# Altium PCB 发射.PcbDoc
Units mil, origin at the board's own origin, x right, y up, seen from the top; angles counter-clockwise.
Board outline 6000 x 4000 mil, 2 copper layers (Top Layer, Bottom Layer); 22 components, 15 nets, 70 pads, 2 vias.
Unrouted connection lines stored in the file: 1.
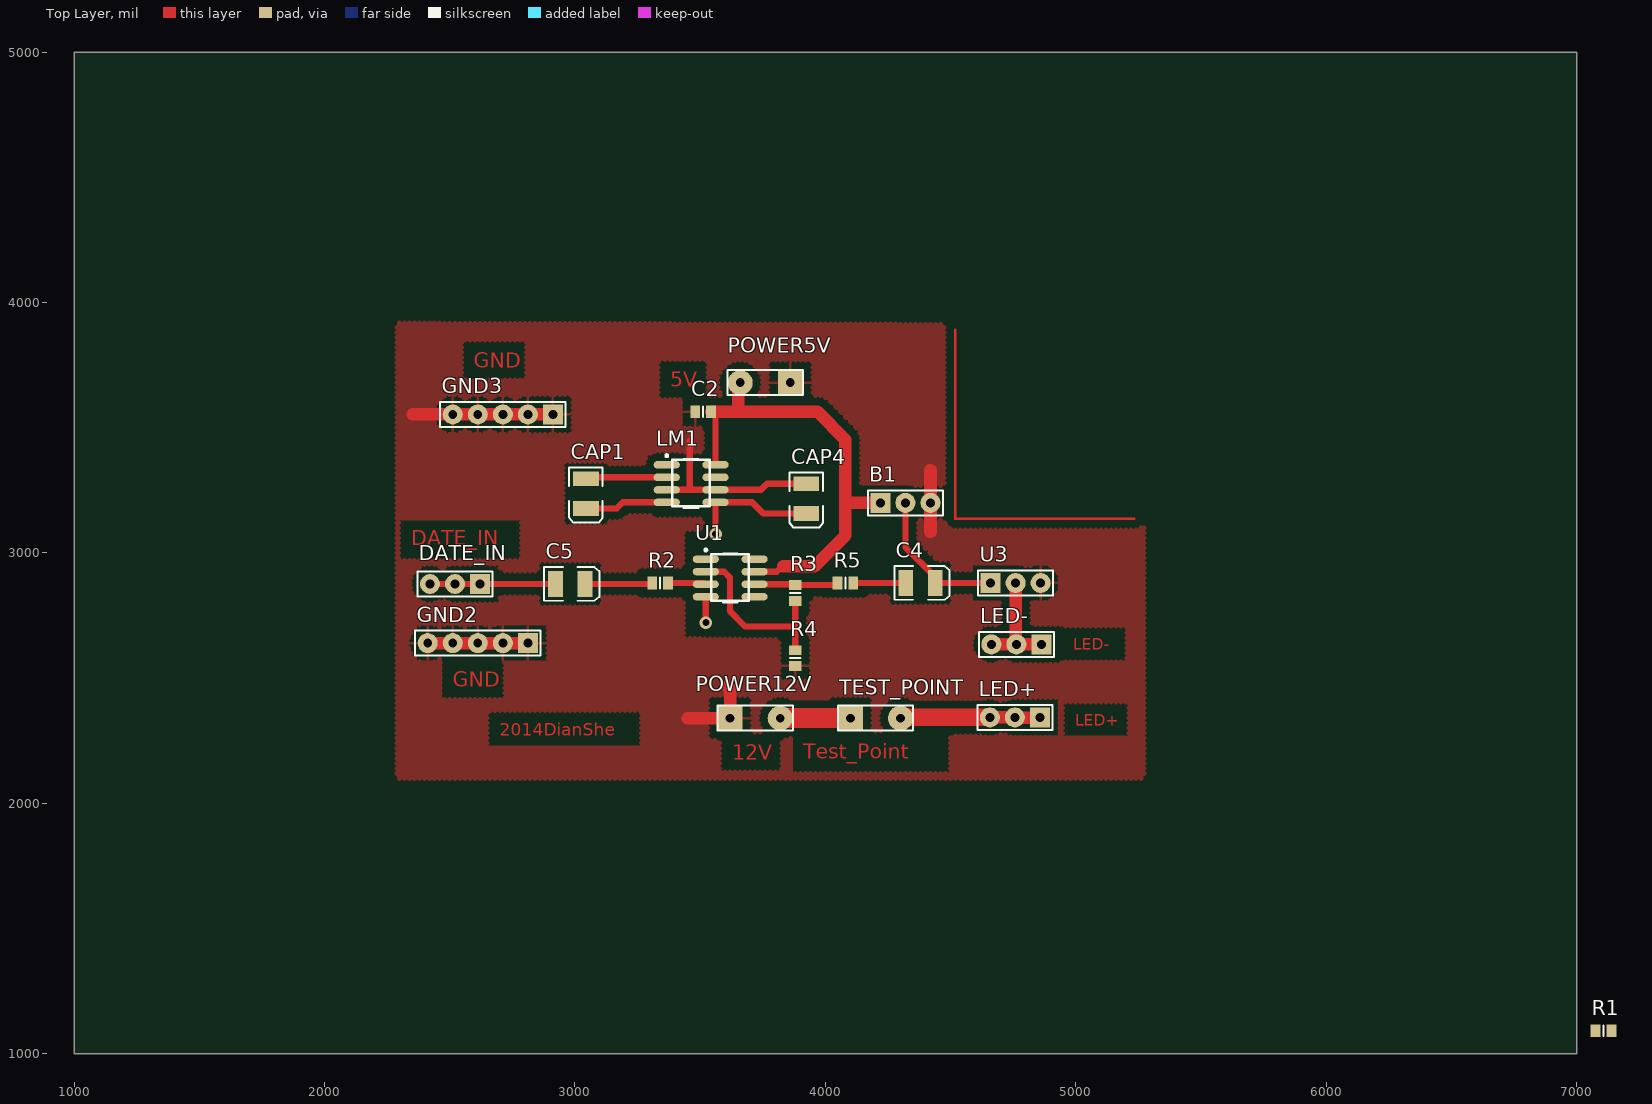
[diagram p0: Top Layer view]
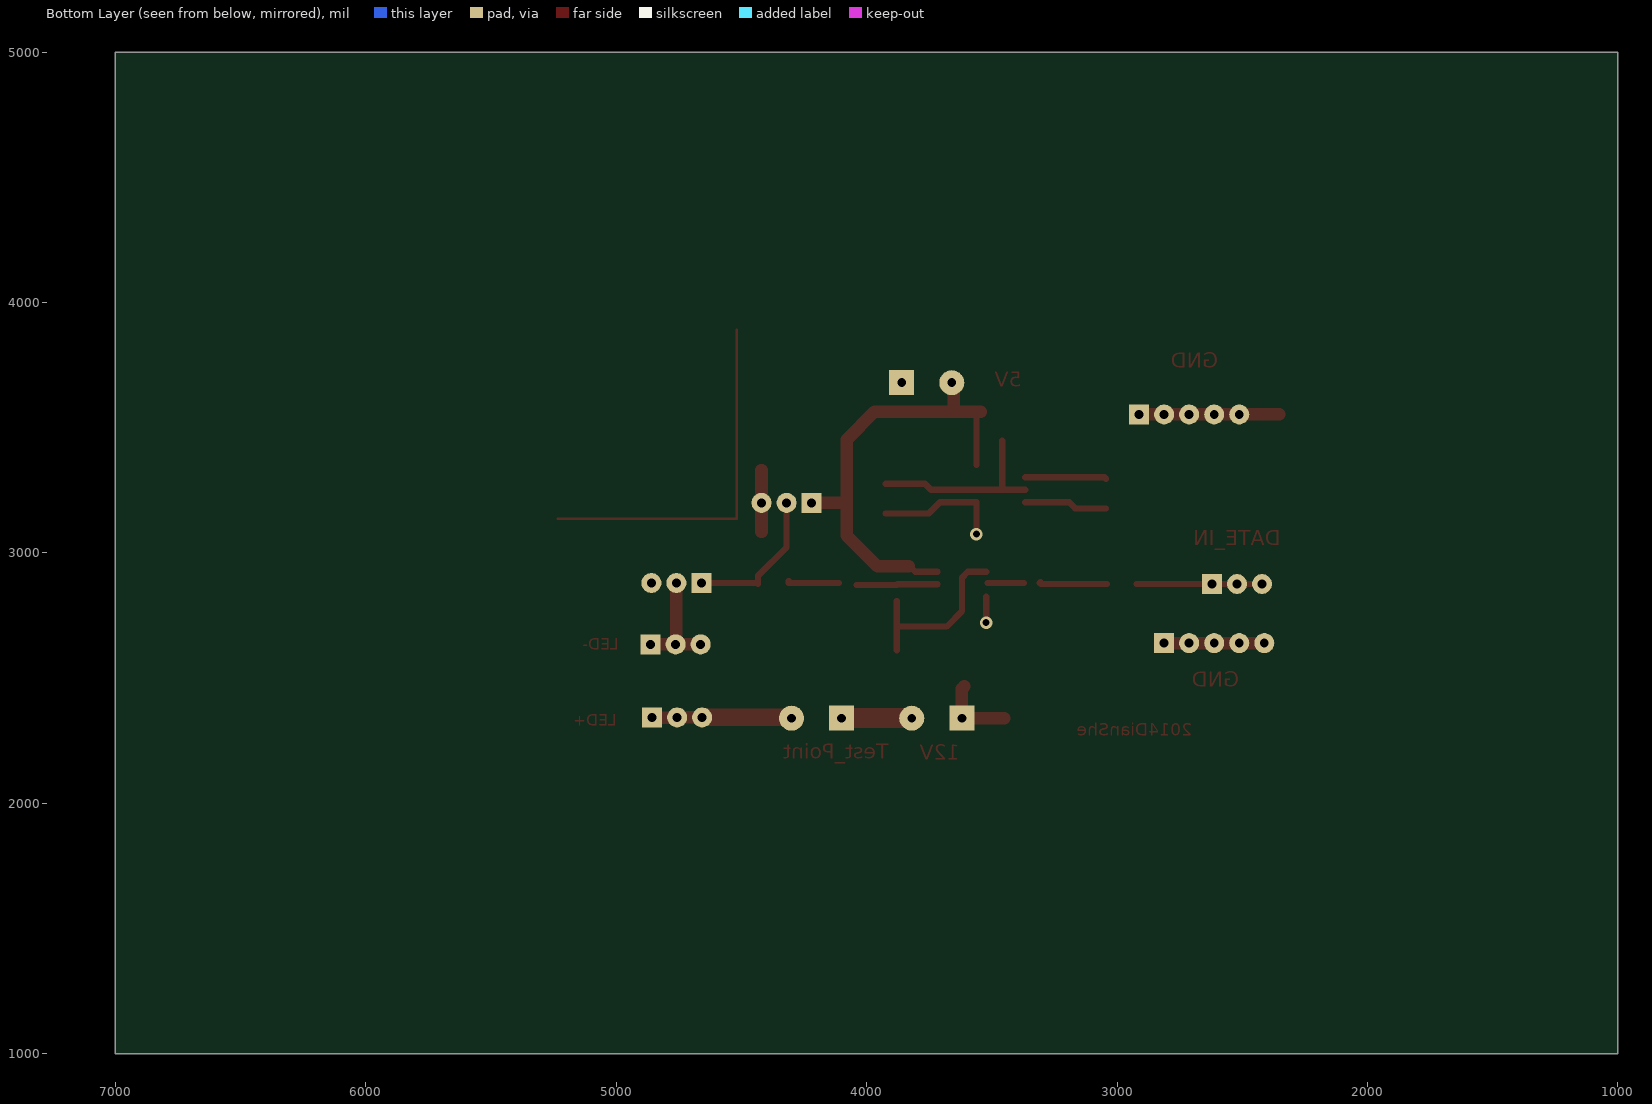
[diagram p1: Bottom Layer view, seen from below]

## Layer stack, top to bottom
Top Layer: signal copper 1.4
Dielectric: dielectric 12.6, FR-4, Dk 4.8
Bottom Layer: signal copper 1.4

## Board outline
1000,1000 7000,1000 7000,5000 1000,5000

## Design rules (kind name [scope] priority, off if disabled: settings)
Clearance [All] p1: gap=30
MinimumSolderMaskSliver [All] p1: minsoldermaskwidth=0
PolygonConnect [All] p1: connectstyle=Relief reliefconductorwidth=10 reliefentries=4 polygonreliefangle="90 Angle"
RoutingVias [All] p1: holewidth=28 width=50 viastyle="Through Hole" minholewidth=28 minwidth=50 maxholewidth=28 maxwidth=50
SilkscreenOverComponentPads [All] p1: minsilkscreentomaskgap=0
SolderMaskExpansion [All] p1: expansion=0
Width [All] p1: maxlimit=100 minlimit=10 preferedwidth=10
26 further rules are at their usual default settings.

## Components (designator, comment, footprint, x,y, rotation, side; value= is the part's Value field where it differs from the comment)
B1 "Header 3" HDR1X3#1 4220,3200 r0 top
C2 "CAP" 0805 3512,3564 r180 top
C4 "无极性" "3528 (3.5X2.8X1.9)" 4380,2880 r0 top
C5 "无极性" "3528 (3.5X2.8X1.9)" 2981,2876 r0 top
CAP1 "Cap B(3528)" "3528 (3.5X2.8X1.9)" 3044,3237 r270 top
CAP4 "Cap B(3528)" "3528 (3.5X2.8X1.9)" 3924,3217 r270 top
DATE_IN "Header 3" HDR1X3#1 2621,2876 r180 top
GND2 "Header 5" HDR1X5 2812,2640 r180 top
GND3 "Header 5" HDR1X5 2912,3553 r180 top
LED+ "Header 3" HDR1X3#1 4857,2343 r180 top
LED- "Header 3" HDR1X3#1 4863,2635 r180 top
LM1 "LM2663" SOIC8 3464,3277 r0 top
POWER5V "Header 3" HDR1X3#2 3860,3680 r180 top
POWER12V "Header 3" HDR1X3#2 3620,2340 r0 top
R1 "R0805" 0805 7108,1092 r0 top
R2 "R0805" 0805 3340,2880 r0 top
R3 "R0805" 0805 3880,2840 r90 top
R4 "R0805" 0805 3880,2580 r90 top
R5 "R0805" 0805 4080,2880 r180 top
TEST_POINT "Header 3" HDR1X3#2 4100,2340 r0 top
U1 "OPA690" SOIC8 3620,2900 r0 top
U3 "Header 3" HDR1X3#1 4660,2880 r0 top

## Footprints (in the part's own frame and the unit in brackets; to place one, negate y for a bottom-side part, rotate by r counter-clockwise, add the part's x,y. Pads: shape width x height; smd on the part's side, far side on the other; paste and mask are expansions set on the pad)
0805 [mm] "Chip Resistor, Body 2.0x1.2mm, IPC High Density"
  rect 1x1.3 smd: 1(-0.8,0) 2(0.8,0)
  silkscreen extent 0,-0.55 0,0.55, body extent -1.07,-0.7 1.07,0.7, height 0.7
"3528 (3.5X2.8X1.9)" [mm] "SM LED; 2 C-Bend Leads; Body 3.5 x 2.8 x 1.9 mm, inc leads (LxWxH typ)"
  rect 1.5x2.6 smd: 1(-1.5,0) 2(1.5,0)
  silkscreen extent -2.65,-1.7 2.95,1.7
HDR1X3#1 [mil] "Connector; Header; 3 Position"
  rect 80x80 hole 35.43: 1(0,0)
  round 80 hole 35.43: 2(100,0) 3(200,0)
  silkscreen extent -50,-50 250,50
HDR1X3#2 [mil] "Connector; Header; 3 Position"
  rect 100x100 hole 35.43: 1(0,0)
  round 0 all layers, no hole: 2(100,0)
  round 100 hole 35.43: 3(200,0)
  silkscreen extent -50,-50 250,50
HDR1X5 [mil] "Connector; Header; 5 Position"
  rect 80x80 hole 35.43: 1(0,0)
  round 80 hole 35.43: 2(100,0) 3(200,0) 4(300,0) 5(400,0)
  silkscreen extent -50,-50 450,50
SOIC8 [mm] "SOIC, 8-Leads,D"
  oval 2.65x0.75 smd: 1(-2.475,1.905) 2(-2.475,0.635) 3(-2.475,-0.635) 4(-2.475,-1.905) 5(2.475,-1.905) 6(2.475,-0.635) 7(2.475,0.635) 8(2.475,1.905)
  silkscreen extent -2.6,-2.5 1.91,2.95

## Part data
B1 DATE_IN LED+ LED- POWER5V POWER12V TEST_POINT U3: "Header, 3-Pin"
C2: library part R0805, "R0805"
C4 C5: library part "Cap B(3528)", "Capacitor"
CAP1 CAP4: "Capacitor"
GND2 GND3: "Header, 5-Pin"

## Via types
v1: diameter 50, hole 28, Top Layer to Bottom Layer, 2 vias

## Nets (pads, with @x,y where several pads share a name; then routed paths per layer and width w, separated by ;. In a path a pad name is that pad's centre, name@x,y a point inside that pad or via, vN(x,y) a via of type N, cw(c..) or ccw(c..) an arc to the next point about the centre after c; other vN are vias at no path point)
GND: B1.3 C2.2 CAP4.1 GND2.1 GND2.2 GND2.3 GND2.4 GND2.5 GND3.1 GND3.2 GND3.3 GND3.4 GND3.5 LM1.3 LM1.6 POWER5V.1 POWER12V.1 R4.1 U3.3 | length 2269.5
  Top Layer w25: LM1.3 3458,3252 ; 3458,3448 3458,3252 ; CAP4.1 3767.06,3276.06 3743,3252 LM1.6 3458,3252
  Top Layer w50: 2352,3553 GND3.5 GND3.4 GND3.3 GND3.2 GND3.1 ; GND2.5 GND2.4 GND2.3 GND2.2 GND2.1 ; 3451,2340 POWER12V.1 3620,2457 3610,2467 ; 4420,3085 B1.3 4420,3331
NetB1_2: B1.2 C4.2 U3.1 | length 594.2
  Top Layer w25: B1.2 4320,3023 4434,2909 C4.2@4434,2876 ; C4.2 U3.1@4662,2880
NetC4_1: C4.1 R5.1 | length 207.5
  Top Layer w25: R5.1 4311,2880 C4.1@4311,2888
NetC5_1: C5.1 DATE_IN.1 DATE_IN.2 DATE_IN.3 | length 515.9
  Top Layer w25: DATE_IN.3 DATE_IN.2 DATE_IN.1 ; DATE_IN.1@2606,2876 C5.1
NetC5_2: C5.2 R2.1 | length 266.6
  Top Layer w25: C5.2 R2.1@3303,2876 ; R2.1@3305.91,2882.6 R2.1
NetCAP1_1: CAP1.1 LM1.2 | length 325
  Top Layer w25: CAP1.1 3049.95,3302 LM1.2
NetCAP1_2: CAP1.2 LM1.4 | length 332.5
  Top Layer w25: CAP1.2 3166.94,3177.94 3191,3202 LM1.4
NetLED+_1: LED+.1 LED+.2 LED+.3 TEST_POINT.3 | length 562
  Top Layer w50: LED+.3 LED+.2 ; LED+.2@4757,2342 LED+.1@4861,2342
  Top Layer w70: TEST_POINT.3@4299,2343 LED+.3
NetLED-_1: LED-.1 LED-.2 LED-.3 U3.2 | length 442
  Top Layer w50: LED-.3 LED-.2 LED-.1@4861,2635 ; LED-.2@4760,2636 U3.2
NetR2_2: R2.2 U1.3 | length 146.1
  Top Layer w25: R2.2 U1.3@3517.56,2880
NetR3_1: R3.1 R4.2 U1.2 | length 722.7
  Top Layer w25: U1.2 3596,2925 3619,2902 3619,2768 3681,2706 3879,2706 ; R4.2 R3.1
OPA_OUT: R3.2 R5.2 U1.6 | length 324
  Top Layer w25: U1.6 3876.5,2875 R3.2 R5.2@4040,2871.5
VCC5V: B1.1 C2.1 LM1.8 POWER5V.3 U1.7 | length 1831.9
  Top Layer w25: LM1.8 3561.44,3560.44 3565,3564 ; U1.7 3806,2925 3825,2944
  Top Layer w50: C2.1 3565,3564 3652,3564 ; POWER5V.3@3652,3664 3652,3564 ; 3831.63,2946.18 3956.18,2946.18 4080,3070 4080,3452 3968,3564 3652,3564 ; 4082,3201 4083,3200 B1.1
VCC12V: POWER12V.3 TEST_POINT.1 | length 282.7
  Top Layer w80: POWER12V.3@3827.49,2340 POWER12V.3 4091,2340 TEST_POINT.1@4094,2343
VCC-5V: CAP4.2 LM1.5 U1.4 | length 610.8
  Top Layer w25: v1(3522.56,2721.56) U1.4 ; v1(3561.44,3075.44) LM1.5 3671,3202 3707,3202 3751.06,3157.94 CAP4.2
pads on no net: LM1.1 LM1.7 POWER5V.2 POWER12V.2 R1.1 R1.2 TEST_POINT.2 U1.1 U1.5 U1.8
copper on no net: | length 1464
  Top Layer w10: 4519,3137 4519,3891 ; 4523,3136 5233,3136

## Polygon pours and split planes (outlines as drawn)
GND on Top Layer "Top Layer-No Net" (hatched 90Degree grid 0 track 20, remove dead copper): 2289,3917.74 2289,2100 5262.95,2100 5273,2100 5273,3911.18

## Other copper
Top Layer:
  pour cut-out: 3586,3512 3586,3180 4049,3180 4049,3528
  pour cut-out: 3432,3094 3801,3092.47 3801,2655.53 3434,2658
  pour cut-out: 3628.13,3136.54 3307,3136.54 3307,3403 3628,3403
  text "GND" at 2596,3740 h60
  text "5V" at 3381,3663 h60
  text "DATE_IN" at 2346,3030 h60
  text "LED-" at 4990,2614 h45
  text "GND" at 2511,2465 h60
  text "LED+" at 4998,2310 h45
  text "2014DianShe" at 2699,2270 h50
  text "Test_Point" at 3911,2179 h60
  text "12V" at 3628,2175 h60